# EAGLE board ife_19_Accumulator_BMS_v1 (EAGLE 9.0.1), part 1 of 2
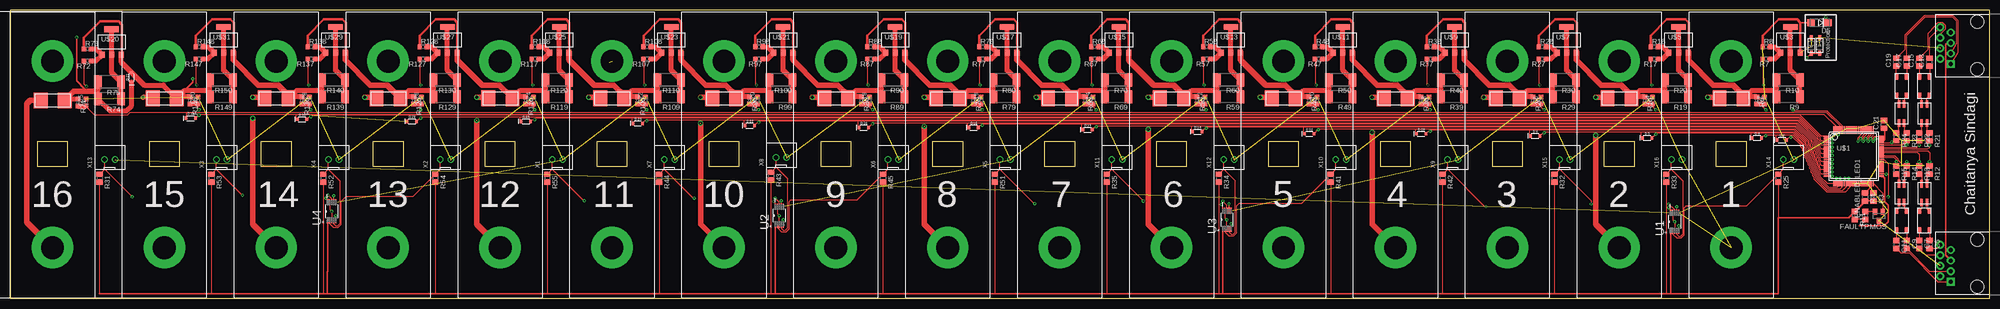
[diagram p0: board, top side]
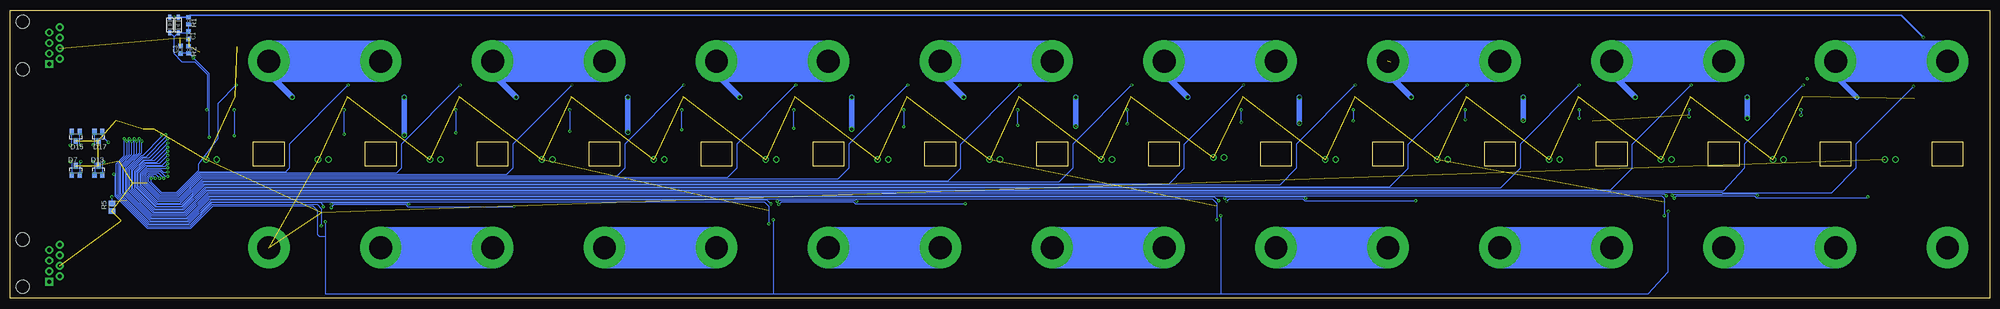
[diagram p1: board, bottom side, seen from below]

Size 477.5 x 69.5 mm. Coordinates in mm from the lower left corner, seen from the top.
Outline: 0,0 477.5,0 477.5,69.5 0,69.5 0,0
Outline: 33.45,31.85 40.85,31.85 40.85,37.85 33.45,37.85 33.45,31.85
Outline: 60.45,31.85 67.85,31.85 67.85,37.85 60.45,37.85 60.45,31.85
Outline: 87.45,31.85 94.85,31.85 94.85,37.85 87.45,37.85 87.45,31.85
Outline: 114.45,31.85 121.85,31.85 121.85,37.85 114.45,37.85 114.45,31.85
Outline: 141.45,31.85 148.85,31.85 148.85,37.85 141.45,37.85 141.45,31.85
Outline: 168.45,31.85 175.85,31.85 175.85,37.85 168.45,37.85 168.45,31.85
Outline: 195.45,31.85 202.85,31.85 202.85,37.85 195.45,37.85 195.45,31.85
Outline: 222.45,31.85 229.85,31.85 229.85,37.85 222.45,37.85 222.45,31.85
Outline: 249.45,31.85 256.85,31.85 256.85,37.85 249.45,37.85 249.45,31.85
Outline: 276.45,31.85 283.85,31.85 283.85,37.85 276.45,37.85 276.45,31.85
Outline: 303.45,31.85 310.85,31.85 310.85,37.85 303.45,37.85 303.45,31.85
Outline: 330.45,31.85 337.85,31.85 337.85,37.85 330.45,37.85 330.45,31.85
Outline: 357.45,31.85 364.85,31.85 364.85,37.85 357.45,37.85 357.45,31.85
Outline: 384.45,31.85 391.85,31.85 391.85,37.85 384.45,37.85 384.45,31.85
Outline: 411.45,31.85 418.85,31.85 418.85,37.85 411.45,37.85 411.45,31.85
Outline: 6.45,31.85 13.85,31.85 13.85,37.85 6.45,37.85 6.45,31.85
Copper layers (1*16): Top 0.035mm / dielectric 1.5mm / Bottom 0.035mm
Design rules "default": minimum track width 6mil, minimum drill 0.35mm, track to track 6mil, track to pad 6mil, pad to pad 6mil, via to via 6mil, smd to smd 6mil, copper to edge 40mil, drill to drill 6mil, minimum pad ring 10mil, minimum via ring 8mil, stop-mask expansion 4mil, vias tented up to drill 0mil, thermal gap 10mil

## Footprints (pad centres in the part's own frame; a part is rotated, then mirrored left to right if it is on the bottom)
C0603K = smd 1.05 x 1.08: 1 -0.875,0; 2 0.875,0
C0805 = smd 1.3 x 1.5: 1 -0.95,0; 2 0.95,0
SOD-123 = smd 1.2 x 0.7: A 1.85,0; C -1.85,0
SOD-323 = smd 0.63 x 0.83: A 1.15,0; C -1.15,0
DO214AC = smd 1.8 x 1.7: A 2.05,0; C -2.05,0
SOT23 = smd 1 x 1.4: 1 -0.95,-1.1; 2 0.95,-1.1; 3 0,1.1
LED0805 = smd 1.3 x 1.5: 1 -0.95,0; 2 0.95,0
0.36"X0.15" = smd 3.327 x 3.81: P$1 -2.896,0; P$2 2.896,0
RJ45-8 = drill 1 pad 1.88 square: 1 -4.445,6.35 | drill 1 pad 1.88: 2 -3.175,8.89; 3 -1.905,6.35; 4 -0.635,8.89; 5 0.635,6.35; 6 1.905,8.89; 7 3.175,6.35; 8 4.445,8.89 | hole 3.2: -5.715,0; 5.715,0
R0603 = smd 1 x 1.1: 1 -0.85,0; 2 0.85,0
R0805 = smd 1.3 x 1.5: 1 -0.95,0; 2 0.95,0
R2512 = smd 1.8 x 3.2: 1 -2.8,0; 2 2.8,0
SOP50P490X110-10N = smd 1.422 x 0.279: 1 -2.184,0.991; 2 -2.184,0.508; 3 -2.184,0; 4 -2.184,-0.508; 5 -2.184,-0.991; 6 2.184,-0.991; 7 2.184,-0.508; 8 2.184,0; 9 2.184,0.508; 10 2.184,0.991
SOIC127P600X175-8N = smd 1.981 x 0.559: 1 -2.464,1.905; 2 -2.464,0.635; 3 -2.464,-0.635; 4 -2.464,-1.905; 5 2.464,-1.905; 6 2.464,-0.635; 7 2.464,0.635; 8 2.464,1.905
TQFP80 = smd 1.3 x 0.35: 1 -6.595,4.75; 2 -6.595,4.25; 3 -6.595,3.75; 4 -6.595,3.25; 5 -6.595,2.75; 6 -6.595,2.25; 7 -6.595,1.75; 8 -6.595,1.25; 9 -6.595,0.75; 10 -6.595,0.25; 11 -6.595,-0.25; 12 -6.595,-0.75; 13 -6.595,-1.25; 14 -6.595,-1.75; 15 -6.595,-2.25; 16 -6.595,-2.75; 17 -6.595,-3.25; 18 -6.595,-3.75; 19 -6.595,-4.25; 20 -6.595,-4.75; 41 6.595,-4.75; 42 6.595,-4.25; 43 6.595,-3.75; 44 6.595,-3.25; 45 6.595,-2.75; 46 6.595,-2.25; 47 6.595,-1.75; 48 6.595,-1.25; 49 6.595,-0.75; 50 6.595,-0.25; 51 6.595,0.25; 52 6.595,0.75; 53 6.595,1.25; 54 6.595,1.75; 55 6.595,2.25; 56 6.595,2.75; 57 6.595,3.25; 58 6.595,3.75; 59 6.595,4.25; 60 6.595,4.75 | smd 0.35 x 1.3: 21 -4.75,-6.595; 22 -4.25,-6.595; 23 -3.75,-6.595; 24 -3.25,-6.595; 25 -2.75,-6.595; 26 -2.25,-6.595; 27 -1.75,-6.595; 28 -1.25,-6.595; 29 -0.75,-6.595; 30 -0.25,-6.595; 31 0.25,-6.595; 32 0.75,-6.595; 33 1.25,-6.595; 34 1.75,-6.595; 35 2.25,-6.595; 36 2.75,-6.595; 37 3.25,-6.595; 38 3.75,-6.595; 39 4.25,-6.595; 40 4.75,-6.595; 61 4.75,6.595; 62 4.25,6.595; 63 3.75,6.595; 64 3.25,6.595; 65 2.75,6.595; 66 2.25,6.595; 67 1.75,6.595; 68 1.25,6.595; 69 0.75,6.595; 70 0.25,6.595; 71 -0.25,6.595; 72 -0.75,6.595; 73 -1.25,6.595; 74 -1.75,6.595; 75 -2.25,6.595; 76 -2.75,6.595; 77 -3.25,6.595; 78 -3.75,6.595; 79 -4.25,6.595; 80 -4.75,6.595
1812-4 = smd 1.35 x 0.9: P$1 -2.32,-1.25; P$2 -2.32,1.25; P$3 2.22,-1.25; P$4 2.22,1.25
PG-SOT-223 = smd 1.2 x 1.4: 1 -2.311,-3.099; 2 0,-3.099; 3 2.311,-3.099 | smd 3.5 x 1.4: 4 0,3.099
744242471 = smd 1.85 x 0.6: 1 -2.28,0.635; 2 -2.28,-0.635; 3 2.28,-0.635; 4 2.28,0.635
JST-XH-02-PACKAGE-ROUND-PAD = drill 1.016: 1 -1.27,0; 2 1.27,0

## Placement (x,y rotation side)
C1  1u  [C0603K]  434.5,63.5 270 bottom
C2  1u  [C0603K]  423.22,47.76 90 top
C3  1u  [C0603K]  436.5,60 90 bottom
C4  1u  [C0603K]  396.22,47.76 90 top
C5  2nF  [C0805]  463,13 270 top
C6  1u  [C0603K]  369.22,47.76 90 top
C7  2nF  [C0805]  460.5,13 270 top
C8  1u  [C0603K]  342.22,47.76 90 top
C9  2nF  [C0805]  457.5,13 270 top
C10  1u  [C0603K]  315.22,47.76 90 top
C11  2nF  [C0805]  455,13 270 top
C12  1u  [C0603K]  288.22,47.76 90 top
C13  2nF  [C0805]  463,57 90 top
C14  1u  [C0603K]  261.22,47.76 90 top
C15  2nF  [C0805]  460.5,57 90 top
C16  1u  [C0603K]  234.22,47.76 90 top
C17  2nF  [C0805]  457.5,57 90 top
C18  1u  [C0603K]  207.22,47.76 90 top
C19  2nF  [C0805]  455,57 90 top
C20  1u  [C0603K]  180.22,47.76 90 top
C21  4.7u  [C0805]  452,42 90 top
C22  1u  [C0603K]  153.22,47.76 90 top
C24  1u  [C0603K]  126.22,47.76 90 top
C25  1u  [C0603K]  18.22,47.26 90 top
C26  1u  [C0603K]  99.22,47.76 90 top
C28  1u  [C0603K]  72.22,47.76 90 top
C30  1u  [C0603K]  45.22,47.76 90 top
D1  [SOD-123]  437,66 90 bottom
D2  4.5-6.3V  [SOD-323]  427.36,38.23 0 top
D3  [SOD-123]  439,66 270 bottom
D4  4.5-6.3V  [SOD-323]  421.36,38.73 0 top
D5  [DO214AC]  436.5,66.5 180 top
D6  4.5-6.3V  [SOD-323]  394.86,38.73 0 top
D7  PESD1CAN  [SOT23]  461.75,30.9 0 bottom
D8  4.5-6.3V  [SOD-323]  367.86,39.23 0 top
D9  [SOD-123]  434.5,61 90 top
D10  4.5-6.3V  [SOD-323]  340.36,39.73 0 top
D11  [SOD-123]  436.5,61 270 top
D12  4.5-6.3V  [SOD-323]  313.36,39.73 0 top
D13  PESD1CAN  [SOT23]  456.25,30.9 0 bottom
D14  4.5-6.3V  [SOD-323]  286.36,40.23 0 top
D15  PESD1CAN  [SOT23]  461.75,39.1 180 bottom
D16  4.5-6.3V  [SOD-323]  259.86,40.73 0 top
D17  PESD1CAN  [SOT23]  456.25,39.1 180 bottom
D18  4.5-6.3V  [SOD-323]  232.36,41.23 0 top
D19  4.5-6.3V  [SOD-323]  43.5,43.5 0 top
D20  4.5-6.3V  [SOD-323]  205.86,41.23 0 top
D21  4.5-6.3V  [SOD-323]  29.27,53.36 90 top
D22  4.5-6.3V  [SOD-323]  178.36,41.73 0 top
D24  4.5-6.3V  [SOD-323]  151.36,42.23 0 top
D26  4.5-6.3V  [SOD-323]  124.36,42.73 0 top
D28  4.5-6.3V  [SOD-323]  96.86,42.73 0 top
D30  4.5-6.3V  [SOD-323]  70.36,43.23 0 top
ENABLED_LED1  LED0805  [LED0805]  447.5,20 90 top
FAULTPMOS  BS250  [SOT23]  450.8,19.85 180 top
FUSE1  2A  [0.36"X0.15"]  415.22,48.27 0 top
FUSE2  2A  [0.36"X0.15"]  10.22,47.77 0 top
FUSE3  2A  [0.36"X0.15"]  388.22,48.27 0 top
FUSE5  2A  [0.36"X0.15"]  361.22,48.27 0 top
FUSE7  2A  [0.36"X0.15"]  334.22,48.27 0 top
FUSE9  2A  [0.36"X0.15"]  307.22,48.27 0 top
FUSE11  2A  [0.36"X0.15"]  280.22,48.27 0 top
FUSE13  2A  [0.36"X0.15"]  253.22,48.27 0 top
FUSE15  2A  [0.36"X0.15"]  226.22,48.27 0 top
FUSE17  2A  [0.36"X0.15"]  199.22,48.27 0 top
FUSE19  2A  [0.36"X0.15"]  172.22,48.27 0 top
FUSE21  2A  [0.36"X0.15"]  145.22,48.27 0 top
FUSE23  2A  [0.36"X0.15"]  118.22,48.27 0 top
FUSE25  2A  [0.36"X0.15"]  91.22,48.27 0 top
FUSE27  2A  [0.36"X0.15"]  64.22,48.27 0 top
FUSE29  2A  [0.36"X0.15"]  37.22,48.27 0 top
J1  RJ45  [RJ45-8]  474.5,61 90 top
J2  RJ45  [RJ45-8]  474.5,8.5 90 top
R1  100  [R0603]  434.5,67 270 bottom
R2  100  [R0603]  434.5,60 270 bottom
R3  100k  [R0805]  449.5,24.5 270 top
R4  100k  [R0805]  447.45,24.5 270 top
R5  50k  [R0805]  453,22 90 bottom
R6  100  [R0603]  421.32,47.76 270 top
R7  2k  [R0603]  423.6,57.8 180 top
R8  100k  [R0603]  423.6,60.72 0 top
R9  [R2512]  428.94,48.65 180 top
R10  [R2512]  428.94,52.72 180 top
R11  330  [R0805]  444.95,20 270 top
R12  10  [R0805]  463,31 270 top
R13  10  [R0805]  460.5,31 270 top
R14  10  [R0805]  457.5,31 270 top
R15  10  [R0805]  455,31 270 top
R16  100  [R0603]  394.32,47.76 270 top
R17  2k  [R0603]  396.6,57.8 180 top
R18  100k  [R0603]  396.6,60.72 0 top
R19  [R2512]  401.94,48.65 180 top
R20  [R2512]  401.94,52.72 180 top
R21  10  [R0805]  463,39 270 top
R22  10  [R0805]  460.5,39 270 top
R23  10  [R0805]  457.5,39 270 top
R24  10  [R0805]  455,39 270 top
R25  680  [R0805]  426.5,29 270 top
R26  100  [R0603]  367.32,47.76 270 top
R27  2k  [R0603]  369.6,57.8 180 top
R28  100k  [R0603]  369.6,60.72 0 top
R29  [R2512]  374.94,48.65 180 top
R30  [R2512]  374.94,52.72 180 top
R31  680  [R0805]  21.5,29 270 top
R32  680  [R0805]  372.5,29 270 top
R33  680  [R0805]  399.5,29 270 top
R34  680  [R0805]  291.5,29 270 top
R35  680  [R0805]  264.5,29 270 top
R36  100  [R0603]  340.32,47.76 270 top
R37  2k  [R0603]  342.6,57.8 180 top
R38  100k  [R0603]  342.6,60.72 0 top
R39  [R2512]  347.94,48.65 180 top
R40  [R2512]  347.94,52.72 180 top
R41  680  [R0805]  318.5,29 270 top
R42  680  [R0805]  345.5,29 270 top
R43  680  [R0805]  183.5,29.5 270 top
R44  680  [R0805]  156.5,29 270 top
R45  680  [R0805]  210.5,29 270 top
R46  100  [R0603]  313.32,47.76 270 top
R47  2k  [R0603]  315.6,57.8 180 top
R48  100k  [R0603]  315.6,60.72 0 top
R49  [R2512]  320.94,48.65 180 top
R50  [R2512]  320.94,52.72 180 top
R51  680  [R0805]  237.5,29 270 top
R52  680  [R0805]  75.5,29 270 top
R53  680  [R0805]  48.5,29 270 top
R54  680  [R0805]  102.5,29 270 top
R55  680  [R0805]  129.5,29 270 top
R56  100  [R0603]  286.32,47.76 270 top
R57  2k  [R0603]  288.6,57.8 180 top
R58  100k  [R0603]  288.6,60.72 0 top
R59  [R2512]  293.94,48.65 180 top
R60  [R2512]  293.94,52.72 180 top
R66  100  [R0603]  259.32,47.76 270 top
R67  2k  [R0603]  261.6,57.8 180 top
R68  100k  [R0603]  261.6,60.72 0 top
R69  [R2512]  266.94,48.65 180 top
R70  [R2512]  266.94,52.72 180 top
R71  100  [R0603]  16.32,47.26 270 top
R72  2k  [R0603]  18.6,57.3 180 top
R73  100k  [R0603]  18.6,60.22 0 top
R74  [R2512]  23.94,48.15 180 top
R75  [R2512]  23.94,52.22 180 top
R76  100  [R0603]  232.32,47.76 270 top
R77  2k  [R0603]  234.6,57.8 180 top
R78  100k  [R0603]  234.6,60.72 0 top
R79  [R2512]  239.94,48.65 180 top
R80  [R2512]  239.94,52.72 180 top
R86  100  [R0603]  205.32,47.76 270 top
R87  2k  [R0603]  207.6,57.8 180 top
R88  100k  [R0603]  207.6,60.72 0 top
R89  [R2512]  212.94,48.65 180 top
R90  [R2512]  212.94,52.72 180 top
R96  100  [R0603]  178.32,47.76 270 top
R97  2k  [R0603]  180.6,57.8 180 top
R98  100k  [R0603]  180.6,60.72 0 top
R99  [R2512]  185.94,48.65 180 top
R100  [R2512]  185.94,52.72 180 top
R106  100  [R0603]  151.32,47.76 270 top
R107  2k  [R0603]  153.6,57.8 180 top
R108  100k  [R0603]  153.6,60.72 0 top
R109  [R2512]  158.94,48.65 180 top
R110  [R2512]  158.94,52.72 180 top
R116  100  [R0603]  124.32,47.76 270 top
R117  2k  [R0603]  126.6,57.8 180 top
R118  100k  [R0603]  126.6,60.72 0 top
R119  [R2512]  131.94,48.65 180 top
R120  [R2512]  131.94,52.72 180 top
R126  100  [R0603]  97.32,47.76 270 top
R127  2k  [R0603]  99.6,57.8 180 top
R128  100k  [R0603]  99.6,60.72 0 top
R129  [R2512]  104.94,48.65 180 top
R130  [R2512]  104.94,52.72 180 top
R136  100  [R0603]  70.32,47.76 270 top
R137  2k  [R0603]  72.6,57.8 180 top
R138  100k  [R0603]  72.6,60.72 0 top
R139  [R2512]  77.94,48.65 180 top
R140  [R2512]  77.94,52.72 180 top
R146  100  [R0603]  43.32,47.76 270 top
R147  2k  [R0603]  45.6,57.8 180 top
R148  100k  [R0603]  45.6,60.72 0 top
R149  [R2512]  50.94,48.65 180 top
R150  [R2512]  50.94,52.72 180 top
U1  TS5A22364DGSR  [SOP50P490X110-10N]  401.5,18.5 90 top
U2  TS5A22364DGSR  [SOP50P490X110-10N]  185.5,20 90 top
U3  TS5A22364DGSR  [SOP50P490X110-10N]  293.5,19 90 top
U4  TS5A22364DGSR  [SOP50P490X110-10N]  77.5,21 90 top
U5  INA148UAG4  [SOIC127P600X175-8N]  -0.5,-19.5 0 top  (outside the outline)
U6  INA148UAG4  [SOIC127P600X175-8N]  -0.5,-32 0 top  (outside the outline)
U7  INA148UAG4  [SOIC127P600X175-8N]  -0.5,-44.5 0 top  (outside the outline)
U8  INA148UAG4  [SOIC127P600X175-8N]  -0.5,-57 0 top  (outside the outline)
U$1  BQ76PL455A  [TQFP80]  444.67,34.33 0 top
U$2  ACT45B  [1812-4]  461.75,51.15 270 top
U$3  BSP296N  [PG-SOT-223]  429.44,62.37 0 top
U$4  ACT45B  [1812-4]  456.25,51.15 270 top
U$5  BSP296N  [PG-SOT-223]  402.44,62.37 0 top
U$6  ACT45B  [1812-4]  461.75,18.75 270 top
U$7  BSP296N  [PG-SOT-223]  375.44,62.37 0 top
U$8  ACT45B  [1812-4]  456.25,18.75 270 top
U$9  BSP296N  [PG-SOT-223]  348.44,62.37 0 top
U$10  WURTH-744242471  [744242471]  461.75,25.4 270 top
U$11  BSP296N  [PG-SOT-223]  321.44,62.37 0 top
U$12  WURTH-744242471  [744242471]  456.25,25.4 270 top
U$13  BSP296N  [PG-SOT-223]  294.44,62.37 0 top
U$14  WURTH-744242471  [744242471]  461.75,44.6 270 top
U$15  BSP296N  [PG-SOT-223]  267.44,62.37 0 top
U$16  WURTH-744242471  [744242471]  456.25,44.6 270 top
U$17  BSP296N  [PG-SOT-223]  240.44,62.37 0 top
U$19  BSP296N  [PG-SOT-223]  213.44,62.37 0 top
U$20  BSP296N  [PG-SOT-223]  24.44,61.87 0 top
U$21  BSP296N  [PG-SOT-223]  186.44,62.37 0 top
U$23  BSP296N  [PG-SOT-223]  159.44,62.37 0 top
U$25  BSP296N  [PG-SOT-223]  132.44,62.37 0 top
U$27  BSP296N  [PG-SOT-223]  105.44,62.37 0 top
U$29  BSP296N  [PG-SOT-223]  78.44,62.37 0 top
U$31  BSP296N  [PG-SOT-223]  51.44,62.37 0 top
X1  JST-XH-02-PIN-ROUND-PAD  [JST-XH-02-PACKAGE-ROUND-PAD]  132,33.5 0 top
X2  JST-XH-02-PIN-ROUND-PAD  [JST-XH-02-PACKAGE-ROUND-PAD]  105,33.5 0 top
X3  JST-XH-02-PIN-ROUND-PAD  [JST-XH-02-PACKAGE-ROUND-PAD]  51,33.5 0 top
X4  JST-XH-02-PIN-ROUND-PAD  [JST-XH-02-PACKAGE-ROUND-PAD]  78,33.5 0 top
X5  JST-XH-02-PIN-ROUND-PAD  [JST-XH-02-PACKAGE-ROUND-PAD]  240,33.5 0 top
X6  JST-XH-02-PIN-ROUND-PAD  [JST-XH-02-PACKAGE-ROUND-PAD]  213,33.5 0 top
X7  JST-XH-02-PIN-ROUND-PAD  [JST-XH-02-PACKAGE-ROUND-PAD]  159,33.5 0 top
X8  JST-XH-02-PIN-ROUND-PAD  [JST-XH-02-PACKAGE-ROUND-PAD]  186,34 0 top
X9  JST-XH-02-PIN-ROUND-PAD  [JST-XH-02-PACKAGE-ROUND-PAD]  348,33.5 0 top
X10  JST-XH-02-PIN-ROUND-PAD  [JST-XH-02-PACKAGE-ROUND-PAD]  321,33.5 0 top
X11  JST-XH-02-PIN-ROUND-PAD  [JST-XH-02-PACKAGE-ROUND-PAD]  267,33.5 0 top
X12  JST-XH-02-PIN-ROUND-PAD  [JST-XH-02-PACKAGE-ROUND-PAD]  294,33.5 0 top
X13  JST-XH-02-PIN-ROUND-PAD  [JST-XH-02-PACKAGE-ROUND-PAD]  24,33.5 0 top
X14  JST-XH-02-PIN-ROUND-PAD  [JST-XH-02-PACKAGE-ROUND-PAD]  429,33.5 0 top
X15  JST-XH-02-PIN-ROUND-PAD  [JST-XH-02-PACKAGE-ROUND-PAD]  375,33.5 0 top
X16  JST-XH-02-PIN-ROUND-PAD  [JST-XH-02-PACKAGE-ROUND-PAD]  402,33.5 0 top

## Library data of the parts
C1-C22 C24-C26 C28 C30 = rcl; SPICEPREFIX: C
D1 D3 D9 D11 = adafruit
D2 D4 D6 D8 D10 D12 D14 D16 D18-D22 D24 D26 D28 D30 = SparkFun-DiscreteSemi; PROD_ID: DIO-12442
D5 D7 D13 D15 D17 = diode
ENABLED_LED1 = LEDS
FAULTPMOS = TRANS
FUSE1-FUSE3 FUSE5 FUSE7 FUSE9 FUSE11 FUSE13 FUSE15 FUSE17 FUSE19 FUSE21 FUSE23 FUSE25 FUSE27 FUSE29 = Fuses_IFE
J1 J2 = SparkFun-Connectors; PROD_ID: CONN-08506; SF_ID: PRT-00643
R1-R60 R66-R80 R86-R90 R96-R100 R106-R110 R116-R120 R126-R130 R136-R140 R146-R150 = rcl; SPICEPREFIX: R
U1-U4 = Texas Instruments_By_element14_Batch_1; MPN: TS5A22364DGSR; OC_FARNELL: 1755579; OC_NEWARK: 85M0257; PACKAGE: MSOP-10; SUPPLIER: Texas Instruments
U5-U8 = Texas Instruments_By_element14_Batch_1; MPN: INA148UAG4; OC_FARNELL: 1206902; OC_NEWARK: 97K1927; PACKAGE: SOIC-8; SUPPLIER: TI
U$1 = bq76pl455a
U$2 U$4 U$6 U$8 U$10 U$12 U$14 U$16 = Chokes
U$3 U$5 U$7 U$9 U$11 U$13 U$15 U$17 U$19-U$21 U$23 U$25 U$27 U$29 U$31 = Infineon
X1-X16 = Rembrandt Electronics - JST XH Connectors v1-0

## Nets
+5V: R3.2 R4.2 R11.1 R25.2 R31.2 R32.2 R33.2 R34.2 R35.2 R41.2 R42.2 R43.2 R44.2 R45.2 R51.2 R52.2 R53.2 R54.2 R55.2 U1.1 U2.1 U3.1 U4.1 U$1.41
CELL1: FUSE1.P$1
CELL2: FUSE3.P$1
CELL3: FUSE5.P$1
CELL4: FUSE7.P$1
CELL5: FUSE9.P$1
CELL6: FUSE11.P$1
CELL7: FUSE13.P$1
CELL8: FUSE15.P$1
CELL9: FUSE17.P$1
CELL10: FUSE19.P$1
CELL11: FUSE21.P$1
CELL12: FUSE23.P$1
CELL13: FUSE25.P$1
CELL14: FUSE27.P$1
CELL15: FUSE29.P$1
CELL16: FUSE2.P$1
CELL_F1: FUSE1.P$2 R6.1 R9.2 R10.2 R18.1 U$5.3
CELL_F2: FUSE3.P$2 R16.1 R19.2 R20.2 R28.1 U$7.3
CELL_F3: FUSE5.P$2 R26.1 R29.2 R30.2 R38.1 U$9.3
CELL_F4: FUSE7.P$2 R36.1 R39.2 R40.2 R48.1 U$11.3
CELL_F5: FUSE9.P$2 R46.1 R49.2 R50.2 R58.1 U$13.3
CELL_F6: FUSE11.P$2 R56.1 R59.2 R60.2 R68.1 U$15.3
CELL_F7: FUSE13.P$2 R66.1 R69.2 R70.2 R78.1 U$17.3
CELL_F8: FUSE15.P$2 R76.1 R79.2 R80.2 R88.1 U$19.3
CELL_F9: FUSE17.P$2 R86.1 R89.2 R90.2 R98.1 U$21.3
CELL_F10: FUSE19.P$2 R96.1 R99.2 R100.2 R108.1 U$23.3
CELL_F11: FUSE21.P$2 R106.1 R109.2 R110.2 R118.1 U$25.3
CELL_F12: FUSE23.P$2 R116.1 R119.2 R120.2 R128.1 U$27.3
CELL_F13: FUSE25.P$2 R126.1 R129.2 R130.2 R138.1 U$29.3
CELL_F14: FUSE27.P$2 R136.1 R139.2 R140.2 R148.1 U$31.3
CELL_F15: D21.A FUSE29.P$2 R73.1 R146.1 R149.2 R150.2 U$20.3
CELL_F16: D1.A D3.C D5.C D21.C FUSE2.P$2 R1.1 R71.1 R74.2 R75.2
COMMH+: D15.1 R22.2 U$1.55
COMMH-: D15.2 R21.2 U$1.54
COMML+: D7.2 R13.1 U$1.52
COMML-: D7.1 R12.1 U$1.53
EQ1: R7.2 U$1.28
EQ2: R17.2 U$1.26
EQ3: R27.2 U$1.24
EQ4: R37.2 U$1.22
EQ5: R47.2 U$1.20
EQ6: R57.2 U$1.18
EQ7: R67.2 U$1.16
EQ8: R77.2 U$1.14
EQ9: R87.2 U$1.12
EQ10: R97.2 U$1.10
EQ11: R107.2 U$1.8
EQ12: R117.2 U$1.6
EQ13: R127.2 U$1.4
EQ14: R137.2 U$1.2
EQ15: R147.2 U$1.80
EQ16: R72.2 U$1.78
FAULT_N: FAULTPMOS.1 U$1.40
FAULTH+: D17.1 R24.2 U$1.57
FAULTH-: D17.2 R23.2 U$1.56
FAULTL+: D13.2 R15.1 U$1.50
FAULTL-: D13.1 R14.1 U$1.51
GATE1: R7.1 R8.2 U$3.1
GATE2: R17.1 R18.2 U$5.1
GATE3: R27.1 R28.2 U$7.1
GATE4: R37.1 R38.2 U$9.1
GATE5: R47.1 R48.2 U$11.1
GATE6: R57.1 R58.2 U$13.1
GATE7: R67.1 R68.2 U$15.1
GATE8: R77.1 R78.2 U$17.1
GATE9: R87.1 R88.2 U$19.1
GATE10: R97.1 R98.2 U$21.1
GATE11: R107.1 R108.2 U$23.1
GATE12: R117.1 R118.2 U$25.1
GATE13: R127.1 R128.2 U$27.1
GATE14: R137.1 R138.2 U$29.1
GATE15: R147.1 R148.2 U$31.1
GATE16: R72.1 R73.2 U$20.1
GND: C1.2 C2.2 C3.2 C4.2 C6.2 C8.2 C10.2 C12.2 C14.2 C16.2 C18.2 C20.2 C21.2 C22.2 C24.2 C25.2 C26.2 C28.2 C30.2 D5.A D7.3 D9.A D11.C D13.3 D15.3 D17.3 FAULTPMOS.3 J1.4 J2.4 R2.1 R5.1 R8.1 U1.6 U2.6 U3.6 U4.6 U$1.30 U$1.35 U$1.37 U$1.48 U$1.69 U$1.72 U$1.74 U$3.3 X1.2 X2.2 X3.2 X4.2 X5.2 X6.2 X7.2 X8.2 X9.2 X10.2 X11.2 X12.2 X13.2 X14.2 X15.2 X16.2
N$1: C5.1 U$6.P$4
N$2: C7.1 U$6.P$3
N$3: C9.1 U$8.P$4
N$4: C11.1 U$8.P$3
N$5: ENABLED_LED1.2 FAULTPMOS.2
N$6: ENABLED_LED1.1 R11.2
N$7: C13.1 U$2.P$2
N$8: C15.1 U$2.P$1
N$9: C17.1 U$4.P$2
N$10: C19.1 U$4.P$1
N$11: U$2.P$3 U$14.2
N$12: U$2.P$4 U$14.1
N$13: U$4.P$3 U$16.2
N$14: U$4.P$4 U$16.1
N$15: U$6.P$1 U$10.3
N$16: U$6.P$2 U$10.4
N$17: U$8.P$1 U$12.3
N$18: U$8.P$2 U$12.4
N$19: R14.2 U$12.1
N$20: R13.2 U$10.2
N$21: R12.2 U$10.1
N$22: R15.2 U$12.2
N$23: R23.1 U$16.4
N$24: R22.1 U$14.3
N$25: R21.1 U$14.4
N$26: R24.1 U$16.3
N$27: C5.2 J2.8
N$28: C7.2 J2.6
N$29: C9.2 J2.3
N$30: C11.2 J2.1
N$31: C13.2 J1.8
N$32: R9.1 R10.1 U$3.2 U$3.4
N$33: C15.2 J1.6
N$34: R19.1 R20.1 U$5.2 U$5.4
N$35: C17.2 J1.3
N$36: R29.1 R30.1 U$7.2 U$7.4
N$37: C19.2 J1.1
N$38: R39.1 R40.1 U$9.2 U$9.4
N$39: C21.1 U$1.58
N$40: R49.1 R50.1 U$11.2 U$11.4
N$42: R59.1 R60.1 U$13.2 U$13.4
N$43: R74.1 R75.1 U$20.2 U$20.4
N$44: R69.1 R70.1 U$15.2 U$15.4
N$47: R79.1 R80.1 U$17.2 U$17.4
N$50: R89.1 R90.1 U$19.2 U$19.4
N$54: R99.1 R100.1 U$21.2 U$21.4
N$58: R109.1 R110.1 U$23.2 U$23.4
N$62: R119.1 R120.1 U$25.2 U$25.4
N$66: R129.1 R130.1 U$27.2 U$27.4
N$70: R139.1 R140.1 U$29.2 U$29.4
N$74: R149.1 R150.1 U$31.2 U$31.4
POWER_SIGNAL: J1.5 J2.5
RX: R3.1 U$1.39
TEMP1: R25.1 U1.2 X14.1
TEMP2: R33.1 U1.4 X16.1
TEMP3: R32.1 U1.8 X15.1
TEMP4: R42.1 U1.10 X9.1
TEMP5: R41.1 U3.2 X10.1
TEMP6: R34.1 U3.4 X12.1
TEMP7: R35.1 U3.8 X11.1
TEMP8: R51.1 U3.10 X5.1
TEMP9: R45.1 U2.2 X6.1
TEMP10: R43.1 U2.4 X8.1
TEMP11: R44.1 U2.8 X7.1
TEMP12: R55.1 U2.10 X1.1
TEMP13: R54.1 U4.2 X2.1
TEMP14: R52.1 U4.4 X4.1
TEMP15: R53.1 U4.8 X3.1
TEMP16: R31.1 U4.10 X13.1
TOP: C1.1 D1.C D3.A R1.2 U$1.76
TSELECT: U1.3 U1.9 U2.3 U2.9 U3.3 U3.9 U4.3 U4.9 U$1.42
TSENSE1: U4.7 U$1.66
TSENSE2: U4.5 U$1.65
TSENSE3: U2.7 U$1.64
TSENSE4: U2.5 U$1.63
TSENSE5: U3.7 U$1.62
TSENSE6: U3.5 U$1.61
TSENSE7: U1.7 U$1.60
TSENSE8: U1.5 U$1.59
TX: R4.1 U$1.38
V+: U5.7 U6.7 U7.7 U8.7
V-: U5.4 U6.4 U7.4 U8.4
VSENSE0: C3.1 D2.A D9.C D11.A R2.2 U$1.29
VSENSE1: C2.1 D2.C D4.A R6.2 U$1.27
VSENSE2: C4.1 D4.C D6.A R16.2 U$1.25
VSENSE3: C6.1 D6.C D8.A R26.2 U$1.23
VSENSE4: C8.1 D8.C D10.A R36.2 U$1.21
VSENSE5: C10.1 D10.C D12.A R46.2 U$1.19
VSENSE6: C12.1 D12.C D14.A R56.2 U$1.17
VSENSE7: C14.1 D14.C D16.A R66.2 U$1.15
VSENSE8: C16.1 D16.C D18.A R76.2 U$1.13
VSENSE9: C18.1 D18.C D20.A R86.2 U$1.11
VSENSE10: C20.1 D20.C D22.A R96.2 U$1.9
VSENSE11: C22.1 D22.C D24.A R106.2 U$1.7
VSENSE12: C24.1 D24.C D26.A R116.2 U$1.5
VSENSE13: C26.1 D26.C D28.A R126.2 U$1.3
VSENSE14: C28.1 D28.C D30.A R136.2 U$1.1
VSENSE15: C30.1 D19.A D30.C R146.2 U$1.79
VSENSE16: C25.1 D19.C R71.2 U$1.77
WAKEUP: R5.2 U$1.49